# EAGLE board mapleCUx_large_068-Maple-unten (EAGLE 7.3.0)
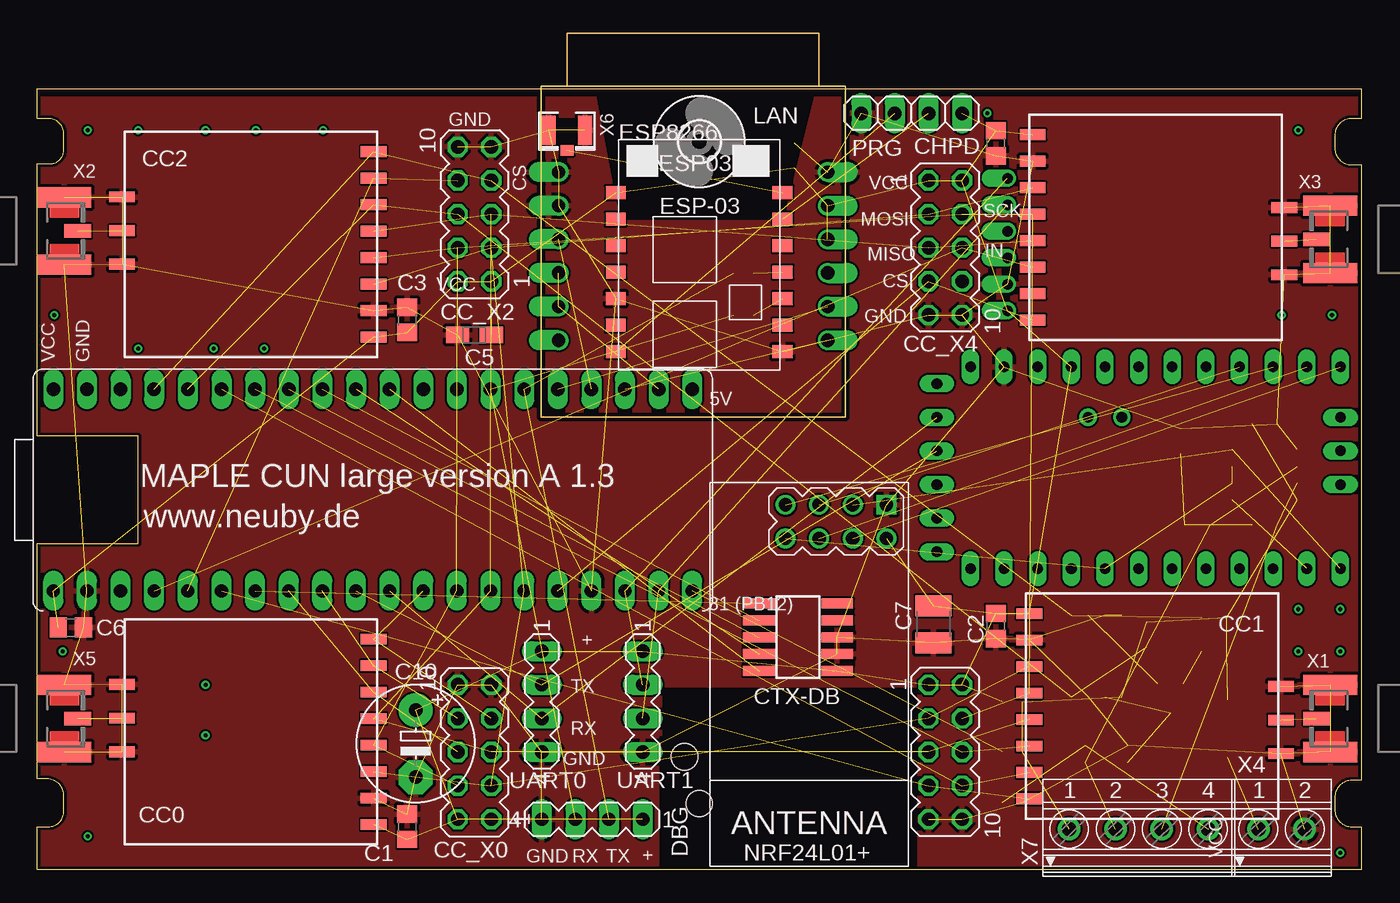
[diagram p0: board, top side]
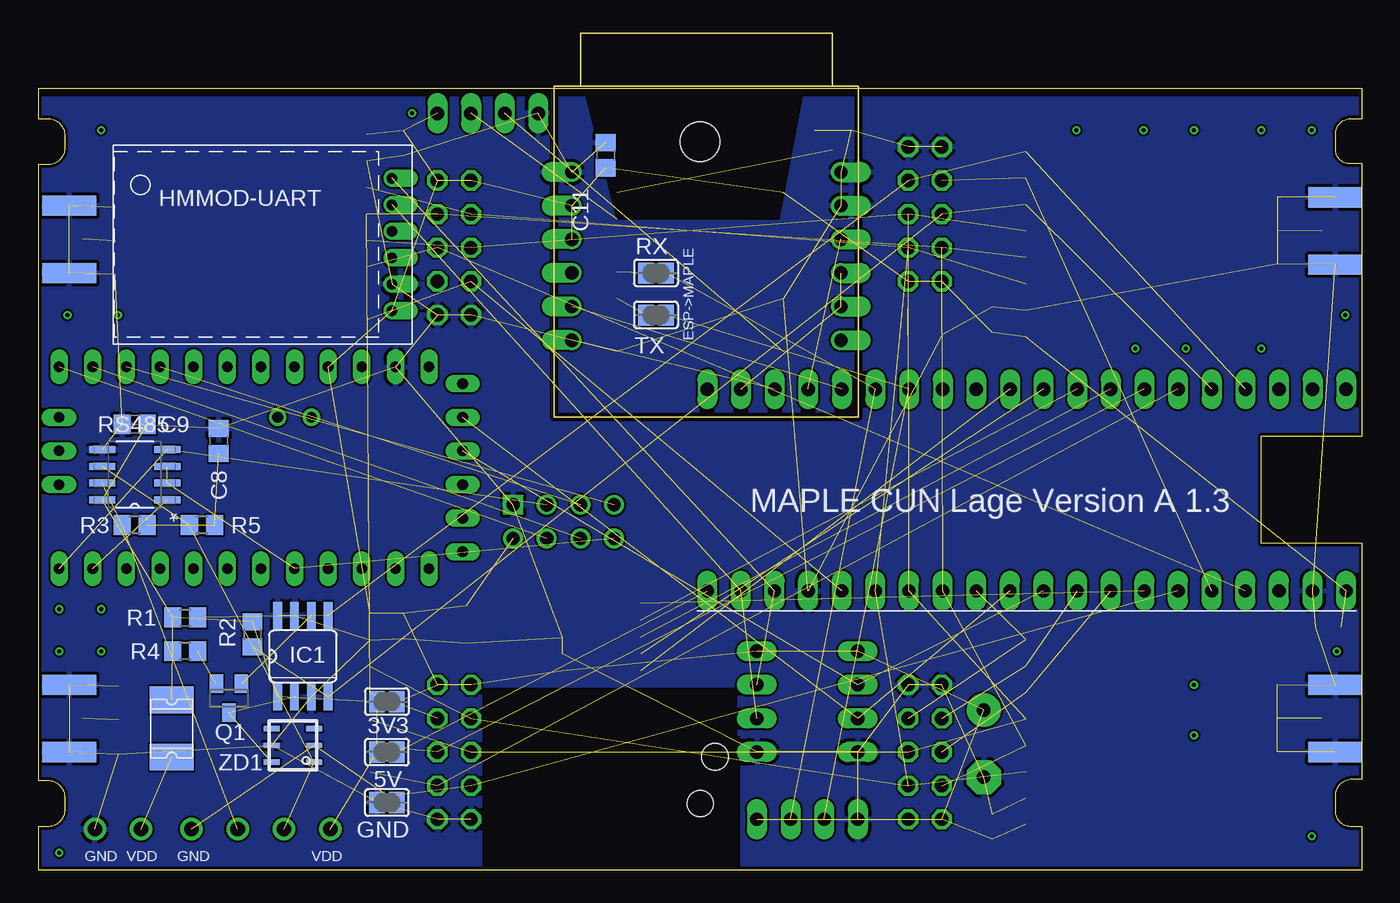
[diagram p1: board, bottom side, seen from below]

Size 100 x 59 mm. Coordinates in mm from the lower left corner, seen from the top.
Outline: 0,0 0,3.25 0.84,3.25 arc90 2,4.41 2,5.59 arc90 0.76,6.86 0,6.86 0,24.64 7.62,24.64 7.62,32.77 0,32.77 0,53.34 1.02,53.34 arc90 2,54.41 2,55.59 arc90 0.84,56.75 0,56.75 0,59 100,59 100,56.75 99.41,56.75 arc90 98,55.59 98,54.41 arc90 99.41,53.25 100,53.25 100,6.75 99.41,6.75 arc90 98,5.59 98,4.41 arc90 99.41,3.25 100,3.25 100,0 0,0
Copper layers (1*16): Top 0.035mm / dielectric 1.5mm / Bottom 0.035mm
Design rules "SeeedStudio_2layer_DRU_no_angle_20140221": minimum track width 6mil, minimum drill 12mil, track to track 6mil, track to pad 6mil, pad to pad 6mil, via to via 6mil, smd to smd 0mil, copper to edge 10mil, drill to drill 10mil, minimum pad ring 10mil, minimum via ring 6mil, stop-mask expansion 2mil, vias tented up to drill 100mil, thermal gap 10mil
Net classes: 0 default: width 0.305 mm; 1 PWR: width 0.457 mm
Holes 2 mm at 48.9,8.53 50,5
tRestrict: area 0,58.6 to 100,59; area 47,-1.9 to 66,10.1
bRestrict: area 0,58.6 to 100,59; area 0,58.6 to 100,59; area 47,-1.9 to 66,10.1

## Footprints (pad centres in the part's own frame; a part is rotated, then mirrored left to right if it is on the bottom)
SJ = smd 1.168 x 1.6: 1 -0.762,0; 2 0.762,0
C0805 = smd 1.3 x 1.5: 1 -0.95,0; 2 0.95,0
R/2012-12W = smd 1.75 x 1.26: + 1.275,0; - -1.275,0
C1210 = smd 1.6 x 2.7: 1 -1.4,0; 2 1.4,0
E5-8,5 = drill 1.016 pad 2.54: + -2.54,0 | drill 1.016 pad 2.54 octagon: - 2.54,0
CC1101_MODULE1_SMD = smd 1.93 x 0.813: ANT 19,5.96; CSN 0,0; GDO0 0,2; GDO2 0,4; GND@0 0,12; GND@1 19,8.5; GND@2 19,3.42; MISO 0,6; MOSI 0,10; SCLK 0,8; VCC 0,14
MA05-2 = drill 1.016 octagon: 1 -5.08,-1.27; 2 -5.08,1.27; 3 -2.54,-1.27; 4 -2.54,1.27; 5 0,-1.27; 6 0,1.27; 7 2.54,-1.27; 8 2.54,1.27; 9 5.08,-1.27; 10 5.08,1.27
1X02 = drill 1.016 long: 1 -1.27,0; 2 1.27,0
1365-10 = smd 0.76 x 2.4: 1 -2.54,-2.95; 2 -2.54,2.95; 3 -1.27,-2.95; 4 -1.27,2.95; 5 0,-2.95; 6 0,2.95; 7 1.27,-2.95; 8 1.27,2.95; 9 2.54,-2.95; 10 2.54,2.95
MA04-1 = drill 1.016 long: 1 -3.81,0; 2 -1.27,0; 3 1.27,0; 4 3.81,0
ESP03 = smd 1.5 x 1: ANT 7.4,4.8; CH_PD 7.4,2.8; GND 7.4,-7.2; GPIO0 -5.2,-7.2; GPIO2 -5.2,-5.2; GPIO12 -5.2,0.8; GPIO13 -5.2,-1.2; GPIO14 -5.2,2.8; GPIO15 -5.2,-3.2; GPIO18 7.4,0.8; NC 7.4,-5.2; URXD 7.4,-1.2; UTXD 7.4,-3.2; VCC -5.2,4.8
1812L = smd 2.03 x 3.3: P$1 -2.16,0; P$2 2.16,0
3,0 = hole 3: 0,0
HM-MOD-UART-DIL = drill 0.8 offset: 1 0,12; 2 0,10; 3 0,8; 4 0,6; 5 0,4; 6 0,2
SO08 = smd 0.66 x 2.032: 1 -1.905,-3.073; 2 -0.635,-3.073; 3 0.635,-3.073; 4 1.905,-3.073; 5 1.905,3.073; 6 0.635,3.073; 7 -0.635,3.073; 8 -1.905,3.073
USR-ES1 = drill 1 pad 1.35 offset: 1 -10.16,5.715; 2 -10.16,3.175; 3 -10.16,0.635; 4 -10.16,-1.905; 5 -10.16,-4.445; 6 -10.16,-6.985; 7 10.16,-6.985; 8 10.16,-4.445; 9 10.16,-1.905; 10 10.16,0.635; 11 10.16,3.175; 12 10.16,5.715
WIRELESS-NRF24L01 = drill 1 square: 1 -12.7,6.35 | drill 1: 2 -10.16,6.35; 3 -12.7,3.81; 4 -10.16,3.81; 5 -12.7,1.27; 6 -10.16,1.27; 7 -12.7,-1.27; 8 -10.16,-1.27
SOT23 = smd 1 x 1.4: 1 -0.95,-1.1; 2 0.95,-1.1; 3 0,1.1
R0805 = smd 1.3 x 1.5: 1 -0.95,0; 2 0.95,0
SOIC127P600X175-8N = smd 1.981 x 0.533: 1 -2.464,1.905; 2 -2.464,0.635; 3 -2.464,-0.635; 4 -2.464,-1.905; 5 2.464,-1.905; 6 2.464,-0.635; 7 2.464,0.635; 8 2.464,1.905
20-DIP = drill 1.016 pad 1.27 long: 1 -24.13,-7.62; 2 -21.59,-7.62; 3 -19.05,-7.62; 4 -16.51,-7.62; 5 -13.97,-7.62; 6 -11.43,-7.62; 7 -8.89,-7.62; 8 -6.35,-7.62; 9 -3.81,-7.62; 10 -1.27,-7.62; 11 1.27,-7.62; 12 3.81,-7.62; 13 6.35,-7.62; 14 8.89,-7.62; 15 11.43,-7.62; 16 13.97,-7.62; 17 16.51,-7.62; 18 19.05,-7.62; 19 21.59,-7.62; 20 24.13,-7.62 | drill 1 pad 1.27 long: 21 24.13,7.62; 22 21.59,7.62; 23 19.05,7.62; 24 16.51,7.62; 25 13.97,7.62; 26 11.43,7.62; 27 8.89,7.62; 28 6.35,7.62; 29 3.81,7.62; 30 1.27,7.62; 31 -1.27,7.62; 32 -3.81,7.62; 33 -6.35,7.62; 34 -8.89,7.62; 35 -11.43,7.62; 36 -13.97,7.62; 37 -16.51,7.62; 38 -19.05,7.62; 39 -21.59,7.62; 40 -24.13,7.62
ABK-PRO-MINI = drill 0.8 long: A0 10.16,-3.81; A1 10.16,-6.35; A2 10.16,-8.89; A3 10.16,-11.43; A6 3.81,-21.59; A7 6.35,-21.59; D2 -5.08,-3.81; D3 -5.08,-6.35; D4 -5.08,-8.89; D5 -5.08,-11.43; D6 -5.08,-13.97; D7 -5.08,-16.51; D8 -5.08,-19.05; D9 -5.08,-21.59; D10 10.16,-21.59; D11 10.16,-19.05; D12 10.16,-16.51; D13 10.16,-13.97; DTR 8.89,8.89; GND 10.16,3.81; GND1 -5.08,-1.27; GND2 -3.81,8.89; GND3 -1.27,8.89; GND4 1.27,-21.59; RAW 10.16,6.35; RST 10.16,1.27; RST1 -5.08,1.27; RX1 -5.08,3.81; RX1-1 3.81,8.89; TX0 -5.08,6.35; TX0-1 6.35,8.89; VCC 10.16,-1.27; VCC1 1.27,8.89 | drill 0.8: A4 6.35,-5.08; A5 6.35,-2.54
SMA_EDGELAUNCH_UFL = smd 4.064 x 1.524: GND@1 2.032,-2.54; GND@2 2.032,2.54 | smd 4.064 x 1.524 bottom: GND@3 2.032,2.54; GND@4 2.032,-2.54 | smd 2.032 x 1.016: P 3.048,0
1751248 = drill 1.1 pad 1.7: 1 -1.75,-0.1; 2 1.75,-0.1
U.FL = smd 2.2 x 1.05: 1 0,1.375; 2 0,-1.375 | smd 0.8 x 1: 3 1.525,0
1751264 = drill 1.1 pad 1.7: 1 -5.25,-0.1; 2 -1.75,-0.1; 3 1.75,-0.1; 4 5.25,-0.1
TSOC6 = smd 0.406 x 1.219: 1 -1.27,-1.6; 2 0,-1.6; 3 1.27,-1.6; 4 1.27,1.6; 5 0,1.6; 6 -1.27,1.6

## Placement (x,y rotation side)
3V3  [SJ]  73.66,12.7 180 bottom
5V  [SJ]  73.66,8.89 0 bottom
C1  22pF  [C0805]  27.94,3.25 270 top
C2  22pF  [C0805]  72.39,18.41 90 top
C3  22pF  [C0805]  27.94,41.55 270 top
C4  22pF  [C0805]  72.39,54.88 90 top
C5  10uF  [R/2012-12W]  33.02,40.4 0 top
C6  22pF  [C0805]  2.54,18.3 0 top
C7  4,7  [C1210]  67.69,18.54 90 top
C8  220p  [C0805]  86.36,32.38 90 bottom
C9  22p  [C0805]  92.71,33.66 0 bottom
C10  100uF  [E5-8,5]  28.57,9.53 270 top
C11  22pF  [C0805]  57.15,53.98 270 bottom
CC0  CC1101  [CC1101_MODULE1_SMD]  25.4,17.41 180 top
CC1  CC1101_MODULE1SMD  [CC1101_MODULE1_SMD]  74.93,5.35 0 top
CC2  CC1101_MODULE1SMD  [CC1101_MODULE1_SMD]  25.4,54.24 180 top
CC4  CC1101_MODULE1SMD  [CC1101_MODULE1_SMD]  75.18,41.53 0 top
CC_X0  [MA05-2]  33.02,8.89 90 top
CC_X1  [MA05-2]  68.58,8.89 270 top
CC_X2  [MA05-2]  33.02,49.53 90 top
CC_X4  [MA05-2]  68.58,46.99 270 top
CHPD  [1X02]  68.58,57.15 180 top
CTX-DB  1365-10  [1365-10]  57.46,17.56 90 top
DBG  [MA04-1]  41.91,3.81 180 top
ESP8266  ESP03  [ESP03]  48.9,46.35 0 top
F1  1812L  [1812L]  89.92,10.67 270 bottom
GND  [SJ]  73.66,5.08 0 bottom
H6  MOUNT-HOLE3.0  [3,0]  50,55 0 top
HMMOD-UART  HM-MOD-UARTDIL  [HM-MOD-UART-DIL]  73.28,54.23 180 bottom
IC1  DS2482-100S  [SO08]  80.01,16.13 0 bottom
IC2  LAN-USR-ES1  [USR-ES1]  49.53,46.99 0 top
NRF24L01+  NRF24L01+  [WIRELESS-NRF24L01]  57.78,14.88 270 top
PRG  [1X02]  63.5,57.15 180 top
Q1  BSS84  [SOT23]  85.6,12.95 180 bottom
R1  4k7  [R0805]  88.9,19.05 0 bottom
R2  4K7  [R0805]  83.82,17.78 270 bottom
R3  60  [R0805]  92.71,26.04 180 bottom
R4  100  [R0805]  88.9,16.51 180 bottom
R5  60  [R0805]  87.63,26.04 180 bottom
RS485  MAX487ECSA+  [SOIC127P600X175-8N]  92.71,29.84 180 bottom
RX  [SJ]  53.34,45.09 180 bottom
TX  [SJ]  53.34,41.91 180 bottom
U$1  MAPLEMINI  [20-DIP]  25.34,28.69 180 bottom
U$2  ABK-PRO-MINI  [ABK-PRO-MINI]  76.83,27.83 90 top
UART0  [MA04-1]  38.1,12.7 270 top
UART1  [MA04-1]  45.72,12.7 270 top
X1  [SMA_EDGELAUNCH_UFL]  99.69,11.43 180 top
X2  [SMA_EDGELAUNCH_UFL]  0,48.26 0 top
X3  [SMA_EDGELAUNCH_UFL]  99.69,47.62 180 top
X4  1751248  [1751248]  93.98,3.17 0 top
X5  [SMA_EDGELAUNCH_UFL]  0,11.43 0 top
X6  [U.FL]  40.01,55.88 270 top
X7  1751264  [1751264]  83.19,3.17 0 top
ZD1  DS9503P  [TSOC6]  80.77,9.4 90 bottom

## Library data of the parts
3V3 5V GND RX TX = jumper
C1-C11 R1-R5 = rcl
CC0 CC1 CC2 CC4 HMMOD-UART = wireless
CC_X0 CC_X1 CC_X2 CC_X4 DBG UART0 UART1 = con-lstb; OC_FARNELL: unknown; OC_NEWARK: unknown
CHPD PRG = pinhead
CTX-DB = con-leotronics; OC_FARNELL: unknown; OC_NEWARK: unknown
ESP8266 = esp8266modules; DIMENSIONS: 17.3 x 12.1 mm; PINS: 14; PITCH: 0.078" / 2 mm
F1 = ptc-littlefuse
H6 = holes
IC1 ZD1 = 1wire
IC2 = Martin-Communication
NRF24L01+ = diy-modules
Q1 = transistor-small-signal
RS485 = Maxim_By_element14_Batch_1; MPN: MAX487ECSA+; OC_FARNELL: 9724532; OC_NEWARK: 68K4803; PACKAGE: SOIC-8; SUPPLIER: Maxim
U$1 = maplemini-small
U$2 = Arduino-clone
X1-X3 X5 X6 = adafruit
X4 = con-phoenix-350; OC_FARNELL: unknown; OC_NEWARK: unknown
X7 = con-phoenix-350; MPN: 1751264; OC_FARNELL: unknown; OC_NEWARK: 10R0934

## Nets
1W: R5.2 RS485.6 X7.2 ZD1.1
2W: R3.2 RS485.7 X7.3
+5V [PWR]: 5V.2 U$1.21
CC_CS0: CC0.CSN CC_X0.7 U$1.29
CC_CS1: CC1.CSN CC_X1.7 U$1.35
CC_CS2: CC2.CSN CC_X2.7 IC1.5 R1.2 U$1.4
CC_CS3: CC4.CSN CC_X4.7 U$1.25
CC_IN_0: CC0.GDO2 CC_X0.6 U$1.33
CC_IN_1: CC1.GDO2 CC_X1.6 U$1.7
CC_IN_2: CC2.GDO2 CC_X2.6 IC1.4 R2.2 U$1.5
CC_IN_3: CC4.GDO2 CC_X4.6 U$1.37
CC_OUT_0: CC0.GDO0 CC_X0.8 U$1.32
CC_OUT_1: CC1.GDO0 CC_X1.8 U$1.6
CC_OUT_2: CC2.GDO0 CC_X2.8 U$1.36
CE-A: NRF24L01+.3 RS485.4 U$2.D9
CSN-A: NRF24L01+.4 U$2.D10
GD [PWR]: GND.2 X7.4 ZD1.2
GND [PWR]: C1.1 C2.1 C3.1 C4.1 C5.- C6.2 C7.1 C8.2 C9.1 C10.- C11.1 CC0.GND@0 CC0.GND@1 CC0.GND@2 CC1.GND@0 CC1.GND@1 CC1.GND@2 CC2.GND@0 CC2.GND@1 CC2.GND@2 CC4.GND@0 CC4.GND@1 CC4.GND@2 CC_X0.9 CC_X0.10 CC_X1.9 CC_X1.10 CC_X2.9 CC_X2.10 CC_X4.9 CC_X4.10 CTX-DB.3 CTX-DB.5 DBG.4 ESP8266.GND ESP8266.GPIO15 GND.1 HMMOD-UART.2 IC1.3 IC1.7 IC1.8 IC2.1 IC2.2 IC2.12 NRF24L01+.1 PRG.2 RS485.5 U$1.24 U$1.39 U$2.GND UART0.4 UART1.4 X1.GND@1 X1.GND@2 X1.GND@3 X1.GND@4 X2.GND@1 X2.GND@2 X2.GND@3 X2.GND@4 X3.GND@1 X3.GND@2 X3.GND@3 X3.GND@4 X4.2 X5.GND@1 X5.GND@2 X5.GND@3 X5.GND@4 X6.1 X6.2 ZD1.5
IRQ-A: NRF24L01+.8 RS485.2 RS485.3 U$2.D2
MISO1: CC0.MISO CC1.MISO CC2.MISO CC4.MISO CC_X0.5 CC_X1.5 CC_X2.5 CC_X4.5 U$1.27
MISO2: IC2.7 U$1.18
MISO-A: NRF24L01+.7 U$2.D12
MOSI1: CC0.MOSI CC1.MOSI CC2.MOSI CC4.MOSI CC_X0.3 CC_X1.3 CC_X2.3 CC_X4.3 U$1.26
MOSI-A: NRF24L01+.6 U$2.D11
N$1: CC1.ANT X1.P
N$2: CC4.ANT X3.P
N$3: CC2.ANT X2.P
N$4: CC0.ANT X5.P
N$8: CTX-DB.7
N$11: ESP8266.GPIO0 PRG.1
N$12: ESP8266.ANT X6.3
N$17: CHPD.2 ESP8266.CH_PD
N$18: ESP8266.URXD RX.2
N$19: ESP8266.UTXD TX.2
N$21: C8.1 R3.1 R5.1
N$33: IC2.6
N$45 [PWR]: F1.P$2 X4.1
N$47: IC1.6 Q1.1
N$48: IC1.2 Q1.3 ZD1.6
N$52: Q1.2 R4.1
NC: CTX-DB.9
NRESET: CTX-DB.10 U$1.34
RO-A: RS485.1 U$2.D8
RST: IC2.3 U$1.17
RX1: HMMOD-UART.5 U$1.22 UART1.3
RX-MAPLE: U$1.30 U$2.TX0-1 UART0.3
RX_DBG: DBG.3 TX.1 U$1.14
SCK1: CC0.SCLK CC1.SCLK CC2.SCLK CC4.SCLK CC_X0.4 CC_X1.4 CC_X2.4 CC_X4.4 U$1.28
SCK2: IC2.4 IC2.5 U$1.19
SCK-A: NRF24L01+.5 U$2.D13
SWCLK/TCK: CTX-DB.4 U$1.10
SWDIO/TMS: CTX-DB.2 U$1.11
SWO/TDO: CTX-DB.6 U$1.8
TDI: CTX-DB.8 U$1.9
TX1: HMMOD-UART.6 U$1.23 UART1.2
TX-MAPLE: U$1.31 U$2.RX1-1 UART0.2
TX_DBG: DBG.2 RX.1 U$1.15
VCC [PWR]: 3V3.1 C1.2 C2.2 C3.2 C4.2 C5.+ C6.1 C7.2 C10.+ C11.2 CC0.VCC CC1.VCC CC2.VCC CC4.VCC CC_X0.1 CC_X0.2 CC_X1.1 CC_X1.2 CC_X2.1 CC_X2.2 CC_X4.1 CC_X4.2 CHPD.1 CTX-DB.1 DBG.1 ESP8266.VCC HMMOD-UART.1 IC2.10 IC2.11 NRF24L01+.2 U$1.40 U$2.VCC UART0.1 UART1.1
VDD [PWR]: 3V3.2 5V.1 C9.2 F1.P$1 IC1.1 R1.1 R2.1 R4.2 RS485.8 X7.1
WIZ_CS: U$1.20
WIZ_RST: IC2.8 U$1.16

## Tracks (layer width: path | path; a pad name or v marks a point on that pad's centre or on a via)
1W  (3 unrouted)
2W  (2 unrouted)
+5V  (1 unrouted)
CC_CS0  (2 unrouted)
CC_CS1  (2 unrouted)
CC_CS2  (4 unrouted)
CC_CS3  (2 unrouted)
CC_IN_0  (2 unrouted)
CC_IN_1  (2 unrouted)
CC_IN_2  (4 unrouted)
CC_IN_3  (2 unrouted)
CC_OUT_0  (2 unrouted)
CC_OUT_1  (2 unrouted)
CC_OUT_2  (2 unrouted)
CE-A  (2 unrouted)
CSN-A  (1 unrouted)
GD  (2 unrouted)
GND  (71 unrouted)
  pour Bottom: 0,59 0.1,0 46.99,0 46.99,13.97 66.67,13.97 66.67,0 100,0 100,59 59.05,59.05 56.52,48.9 43.81,48.9 41.91,59.05
  pour Top: 0.13,0 0,59 41.91,59.05 43.81,48.9 56.52,48.9 59.05,59.05 100,59 100,0 66.67,0 66.67,13.97 46.99,13.97 46.99,0
IRQ-A  (3 unrouted)
MISO1  (8 unrouted)
MISO2  (1 unrouted)
MISO-A  (1 unrouted)
MOSI1  (8 unrouted)
MOSI-A  (1 unrouted)
N$1  (1 unrouted)
N$2  (1 unrouted)
N$3  (1 unrouted)
N$4  (1 unrouted)
N$6  (via drill 0.3 pad 0.61)
  other vias: 3.81,55.88
N$7  (via drill 0.3 pad 0.61)
  other vias: 1.27,41.91
N$9  (via drill 0.3 pad 0.61)
  other vias: 3.81,2.54
N$10  (via drill 0.3 pad 0.61)
  other vias: 1.91,16.51
N$11  (1 unrouted)
N$12  (1 unrouted)
N$13  (via drill 0.3 pad 0.61)
  other vias: 7.62,55.88
N$14  (via drill 0.3 pad 0.61)
  other vias: 12.7,55.88
N$16  (via drill 0.3 pad 0.61)
  other vias: 95.25,55.88
N$17  (1 unrouted)
N$18  (1 unrouted)
N$19  (1 unrouted)
N$21  (2 unrouted)
N$22  (via drill 0.3 pad 0.61)
  other vias: 7.62,39.37
N$23  (via drill 0.3 pad 0.61)
  other vias: 13.34,39.37
N$25  (via drill 0.3 pad 0.61)
  other vias: 17.14,39.37
N$28  (via drill 0.3 pad 0.61)
  other vias: 12.7,13.97
N$31  (via drill 0.3 pad 0.61)
  other vias: 71.75,57.15
N$35  (via drill 0.3 pad 0.61)
  other vias: 98.42,1.27
N$36  (via drill 0.3 pad 0.61)
  other vias: 21.59,55.88
N$37  (via drill 0.3 pad 0.61)
  other vias: 16.51,55.88
N$38  (via drill 0.3 pad 0.61)
  other vias: 12.7,10.16
N$39  (via drill 0.3 pad 0.61)
  other vias: 93.98,41.91
N$40  (via drill 0.3 pad 0.61)
  other vias: 98.42,16.51
N$41  (via drill 0.3 pad 0.61)
  other vias: 95.25,16.51
N$42  (via drill 0.3 pad 0.61)
  other vias: 98.42,19.68
N$43  (via drill 0.3 pad 0.61)
  other vias: 95.25,19.68
N$44  (via drill 0.3 pad 0.61)
  other vias: 97.79,41.91
N$45  (1 unrouted)
N$47  (1 unrouted)
N$48  (2 unrouted)
N$52  (1 unrouted)
NRESET  (1 unrouted)
RO-A  (1 unrouted)
RST  (1 unrouted)
RX1  (2 unrouted)
RX-MAPLE  (2 unrouted)
RX_DBG  (2 unrouted)
SCK1  (8 unrouted)
SCK2  (2 unrouted)
SCK-A  (1 unrouted)
SWCLK/TCK  (1 unrouted)
SWDIO/TMS  (1 unrouted)
SWO/TDO  (1 unrouted)
TDI  (1 unrouted)
TX1  (2 unrouted)
TX-MAPLE  (2 unrouted)
TX_DBG  (2 unrouted)
VCC  (33 unrouted)
VDD  (9 unrouted)
WIZ_RST  (1 unrouted)

## Text on the board
tNames: GND | LAN | CS | ESP-03 | VCC | MOSI | SCK | MISO | IN | VCC | CS | GND | VCC | GND | 5V | MAPLE CUN large version A 1.3 | www.neuby.de | 31 (PB12) | + | TX | RX | GND | GND | + | RX | TX | VCC
bNames: ESP->MAPLE | MAPLE CUN Lage Version A 1.3 | VDD | GND | VDD | GND